# Altium PCB LiPoBattery.PcbDoc
Units mil, origin at the board's own origin, x right, y up, seen from the top; angles counter-clockwise.
Board outline 2000 x 2000 mil, 2 copper layers (Top Layer, Bottom Layer); 22 components, 10 nets, 59 pads, 9 vias.
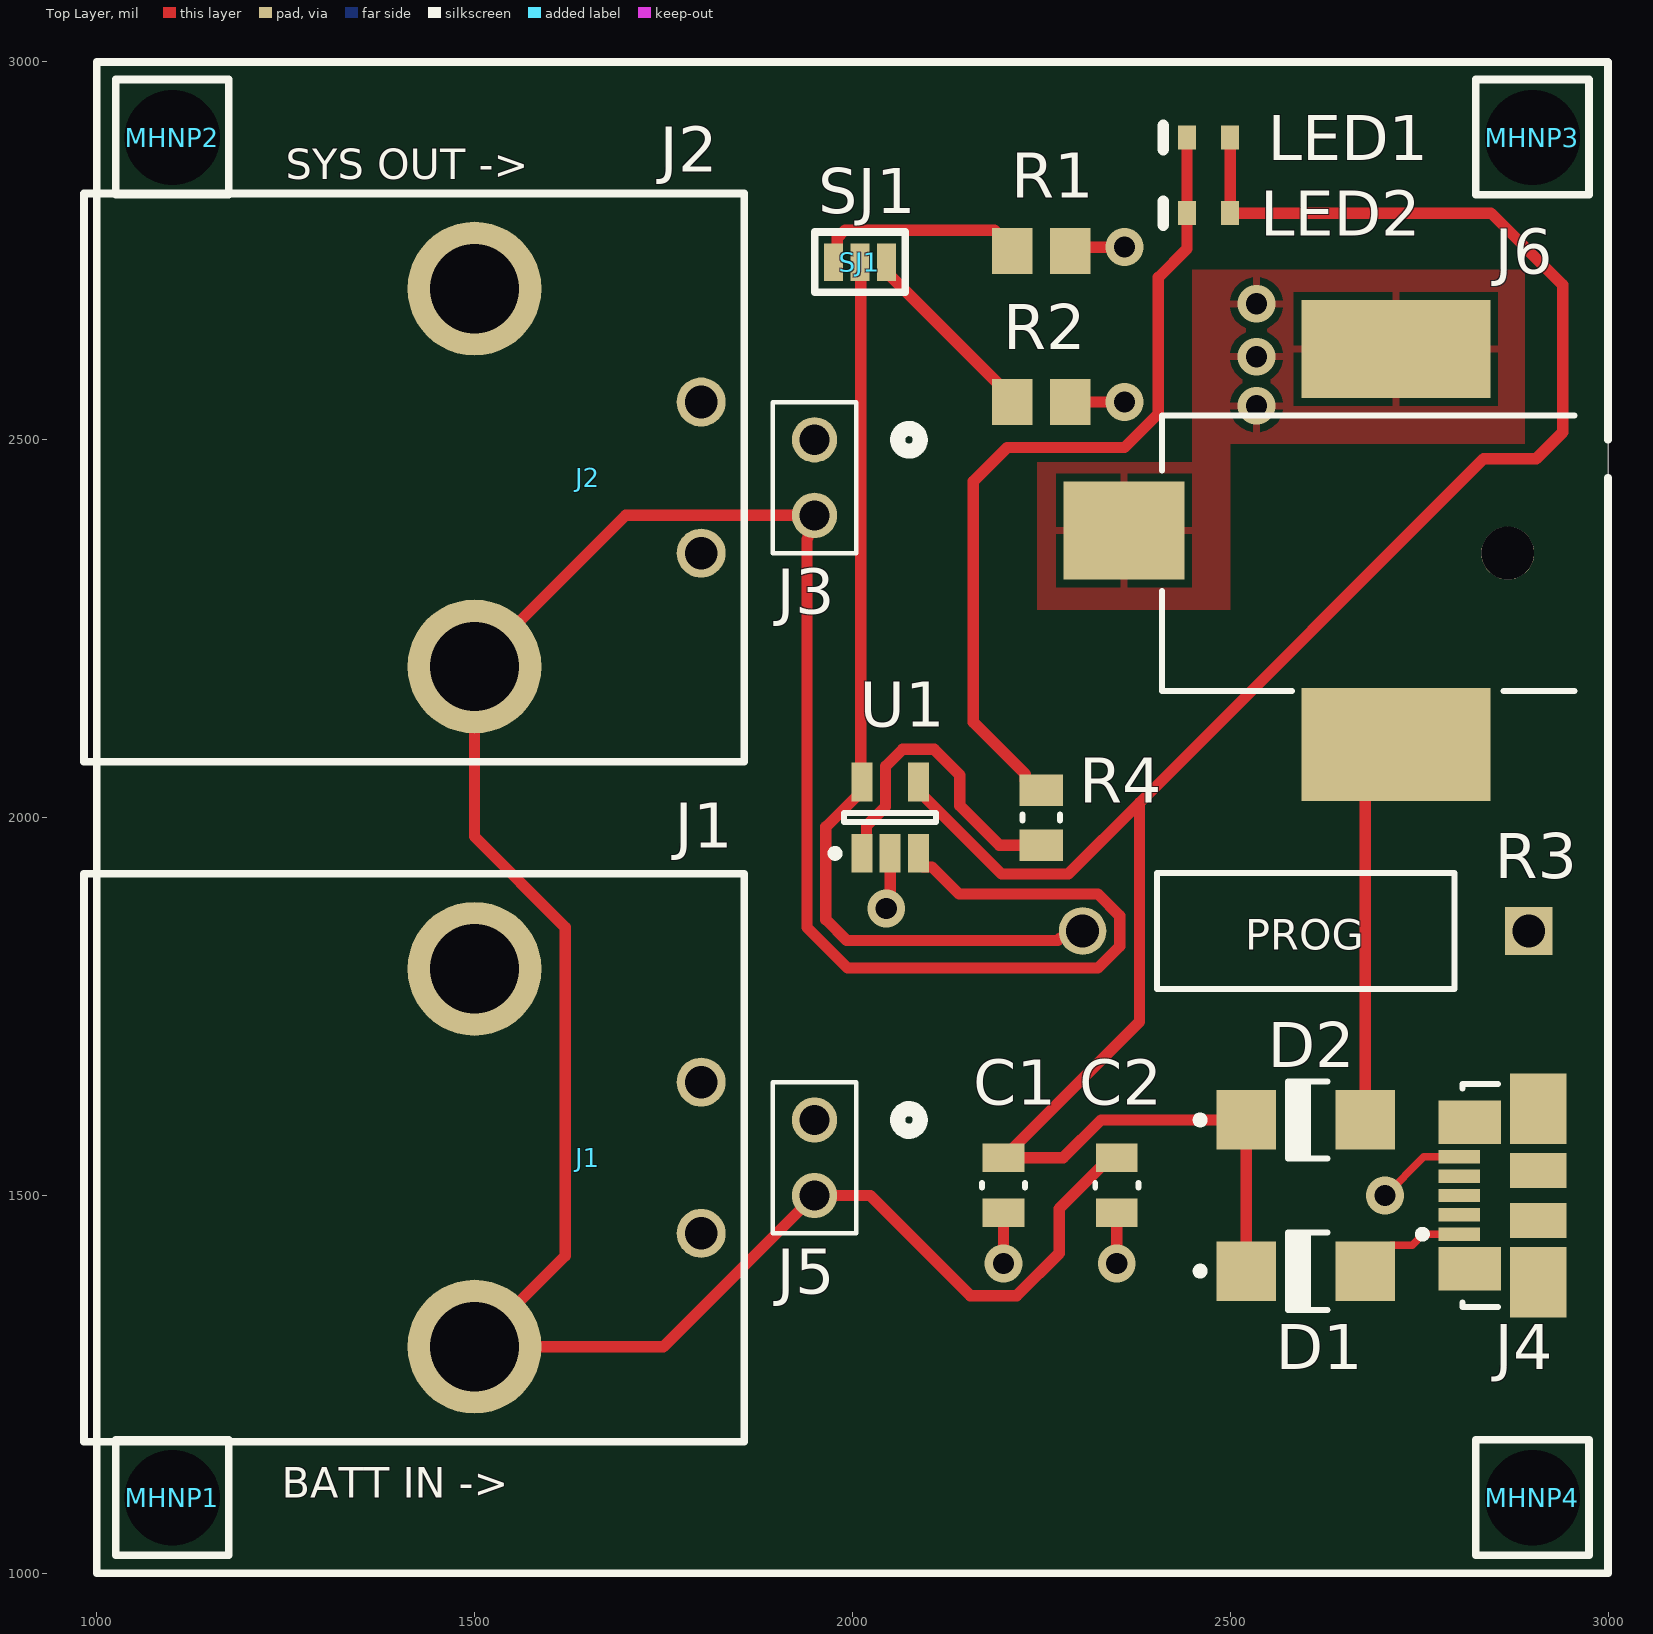
[diagram p0: Top Layer view]
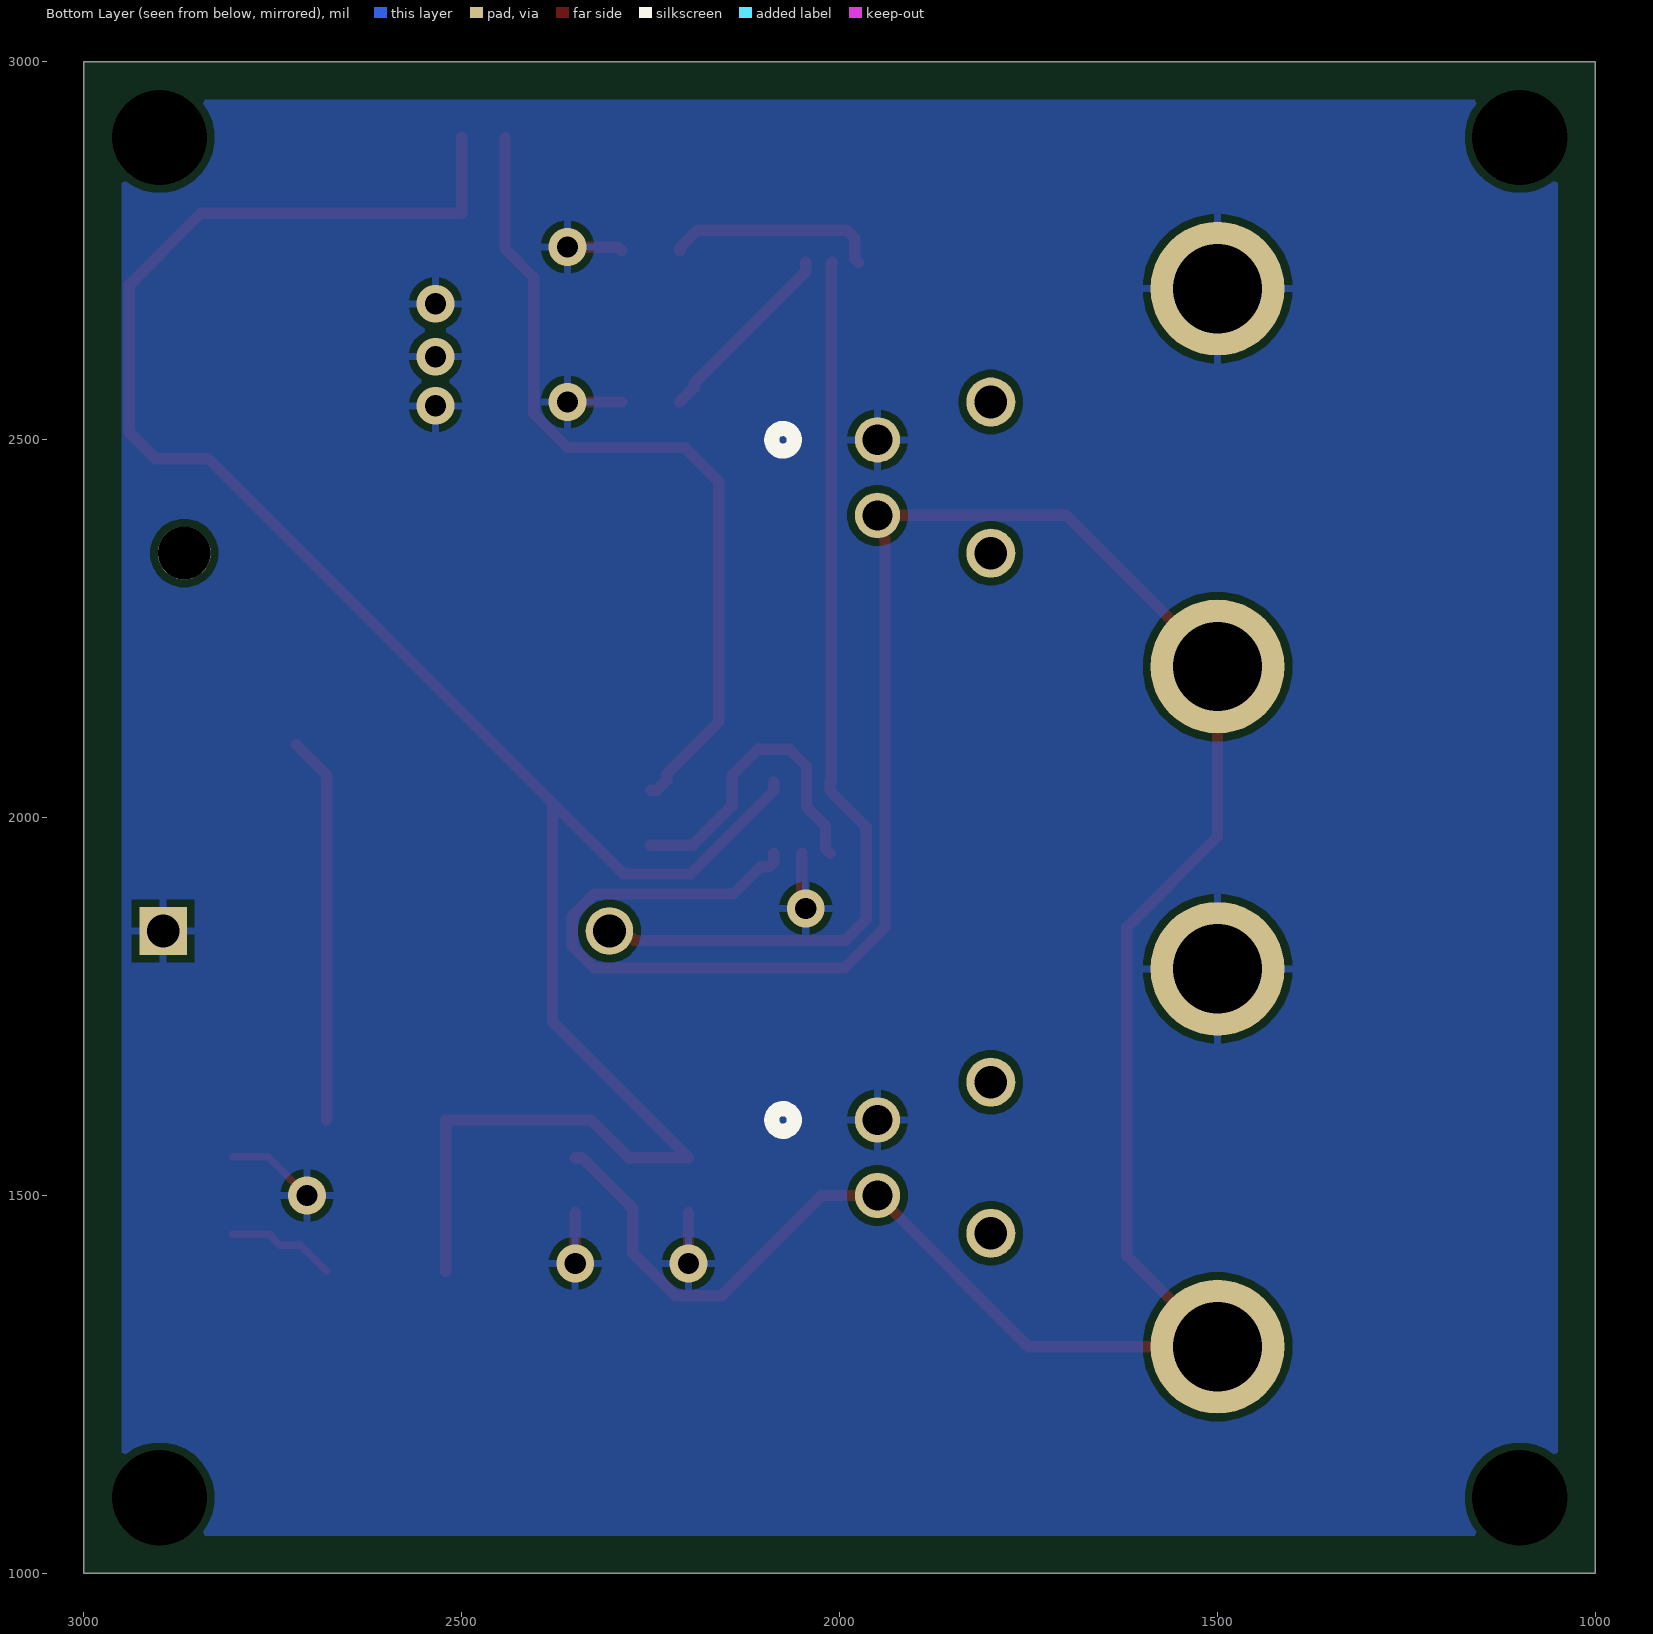
[diagram p1: Bottom Layer view, seen from below]

## Layer stack, top to bottom
Top Solder: solder mask 0.4, Solder Resist, Dk 3.5
Top Layer: signal copper 1.4
Dielectric 1: dielectric 12.6, FR-4, Dk 4.8
Bottom Layer: signal copper 1.4
Bottom Solder: solder mask 0.4, Solder Resist, Dk 3.5

## Board outline
1000,1000 1000,3000 3000,3000 3000,1000

## Design rules (kind name [scope] priority, off if disabled: settings)
Clearance [All] p1: gap=10 ignorepadtopadclearanceinfootprint=TRUE except(0: Arc-Hole Track-Hole SMDPad-Hole THPad-Hole Via-Hole Fill-Hole Poly-Hole Region-Hole Text-Hole)
PolygonConnect [All] p1: connectstyle=Relief reliefconductorwidth=10 reliefentries=4 polygonreliefangle="90 Angle" airgapwidth=10
RoutingVias [All] p1: holewidth=28 width=50 viastyle="Through Hole" minholewidth=28 minwidth=50 maxholewidth=28 maxwidth=50
SolderMaskExpansion [All] p1: expansion=4 istentingtop=FALSE
Width [All] p1: maxlimit=40 minlimit=10 preferedwidth=10 minimp=50.000000 maximp=50.000000 favimp=50.000000
30 further rules are at their usual default settings.

## Components (designator, comment, footprint, x,y, rotation, side; value= is the part's Value field where it differs from the comment)
C1 "4.7uF" FP-CC0805-0_85-MFG 2200,1513.58 r270 top value="4.7 uF"
C2 "4.7uF" FP-CC0805-0_85-MFG 2350,1513.58 r270 top value="4.7 uF"
D1 "40V, 1A" ONSC-SMA-2-403D-02_V 2600,1400 r0 top
D2 "40V, 1A" ONSC-SMA-2-403D-02_V 2600,1600 r0 top
J1 "CONN HEADER R/A 2POS 5.08MM" 1-179276-2 1500,1800 r270 top
J2 "CONN HEADER R/A 2POS 5.08MM" 1-179276-2 1500,2700 r270 top
J3 "2 POS VERT HEADER 0.100\"" 2Pins_AMP 1950,2500 r180 top
J4 "47346-0001" MOLX-47346-0001-5_V 2900,1500 r90 top
J5 "2 POS VERT HEADER 0.100\"" 2Pins_AMP 1950,1600 r180 top
J6 "CONN PWR JACK 2.1X5.5MM SOLDER" FP-RASM722PTR13X-MFG 2700,2350 r90 top
LED1 "RED" VISH-TLMS1000_V 2471.46,2800 r180 top
LED2 "RED" VISH-TLMS1000_V 2471.46,2900 r180 top
MHNP1 "Mounting Hole Non-Plated 3.2mm" MTHNP3P2MM 1100,1100 r90 top
MHNP2 "Mounting Hole Non-Plated 3.2mm" MTHNP3P2MM 1100,2900 r90 top
MHNP3 "Mounting Hole Non-Plated 3.2mm" MTHNP3P2MM 2900,2900 r90 top
MHNP4 "Mounting Hole Non-Plated 3.2mm" MTHNP3P2MM 2900,1100 r90 top
R1 "2k" RESC2013X70X40ML20T20 2250,2550 r180 top
R2 "10k" RESC2013X70X40ML20T20 2250,2750 r180 top
R3 "PROG" VISH-A1-2_V2 2600,1850 r180 top
R4 "330" RESC2013X50X30NL20T20 2250,2000 r270 top
SJ1 "SJUMPER3POS" SJUMPER3POS-Footprint-1 2010,2735 r180 top
U1 "Charge Management Controller" SOT-23-OT5_M 2050,2000 r90 top

## Footprints (in the part's own frame and the unit in brackets; to place one, negate y for a bottom-side part, rotate by r counter-clockwise, add the part's x,y. Pads: shape width x height; smd on the part's side, far side on the other; paste and mask are expansions set on the pad)
1-179276-2 [mm]
  round 4.5 hole 3: 1(0,0) 2(12.7,0)
  round 1.65 hole 1.1: ""(3.81,7.62) ""(8.89,7.62)
  silkscreen extent -3.2,-13.13 15.9,9.08, body extent -3.02,-13.55 16.06,8.55, height 10.86
2Pins_AMP [mil]
  round 60 hole 40 mask+0: 1(0,0) 2(0,100)
  silkscreen extent -140,-50 55,150, body extent 0,0 10,10, height 10
FP-CC0805-0_85-MFG [mm]
  rect 0.95x1.4 smd paste+0 mask+0: 1(-0.925,0) 2(0.925,0)
  silkscreen extent -0.08,-0.72 0.08,0.72, body extent -1.6,-1.05 1.6,1.05, height 0.25
FP-RASM722PTR13X-MFG [mm]
  rect 3.3x4.06 smd paste+0 mask+0: 1(0.76,8.65)
  rect 3.81x6.35 smd paste+0 mask+0: 2(-6.43,-0.49)
  rect 3.3x6.35 smd paste+0 mask+0: 3(6.86,-0.49)
  round 1.78 hole 1.78 unplated paste-1000 mask+0: ""(0,-4.25)
  silkscreen extent -4.63,-6.5 4.63,7.38, body extent -8.43,-7.48 8.61,10.78, height 0.25
MOLX-47346-0001-5_V [mm] "SMD, 5-Leads, Body 7.5x5mm, Pitch 0.65mm"
  rect 0.45x1.38 smd: 1(-1.3,2.46) 2(-0.65,2.46) 3(0,2.46) 4(0.65,2.46) 5(1.3,2.46)
  rect 1.475x2.1 smd: 6(-2.462,2.1) 7(2.462,2.1)
  rect 2.375x1.9 smd: 8(-2.913,-0.2) 11(2.913,-0.2)
  rect 1.175x1.9 smd: 9(-0.837,-0.2) 10(0.837,-0.2)
  silkscreen extent -3.75,1.16 3.75,3.82, body extent -3.99,-2.78 3.99,2.65, height 2.69
MTHNP3P2MM [mm]
  round 1 hole 3.2: ""(0,0)
  silkscreen extent -1.92,-1.9 1.95,1.9
ONSC-SMA-2-403D-02_V [mm]
  rect 2x2 smd: 1(-2,0) 2(2,0)
  silkscreen extent -3.67,-1.3 0.74,1.3, body extent -2.16,-1.3 2.16,1.3, height 2.2
RESC2013X50X30NL20T20 [mm]
  rect 1.05x1.45 smd: 1(-0.925,0) 2(0.925,0)
  silkscreen extent -0.1,-0.63 0.1,0.63, body extent -1.1,-0.72 1.1,0.72, height 0.5
RESC2013X70X40ML20T20 [mm]
  rect 1.35x1.55 smd: 1(-0.975,0) 2(0.975,0)
  body extent -1.1,-0.72 1.1,0.72, height 0.7
SJUMPER3POS-Footprint-1 [mil]
  rect 25x50 smd: 1(-35,0) 2(0,0) 3(35,0)
  silkscreen extent -60,-40 60,40
SOT-23-OT5_M [mm]
  rect 1.3x0.7 smd: 1(-1.2,0.95) 2(-1.2,0) 3(-1.2,-0.95) 4(1.2,-0.95) 5(1.2,0.95)
  silkscreen extent -1.32,-1.55 0.15,1.97, body extent -0.9,-1.55 0.9,1.55, height 1.45
VISH-A1-2_V2 [mm]
  rect 1.6x1.6 hole 1.1: 1(-7.5,0)
  round 1.6 hole 1.1: 2(7.5,0)
  silkscreen extent -5,-1.95 5,1.95, body extent -7.91,-1.95 7.92,1.95, height 3.88
VISH-TLMS1000_V [mm]
  rect 0.6x0.8 smd: 1(-0.725,0) 2(0.725,0)
  silkscreen extent 1.52,-0.4 1.52,0.4, body extent -0.8,-0.4 0.8,0.4, height 0.65

## Part data
C1 C2: library part "CAP CER 4.7UF 6.3V X7R 0805", "4.7µF ±10% 6.3V Ceramic Capacitor X7R 0805 (2012 Metric)", Capacitance="4.7 uF", Manufacturer=Yageo, Manufacturer Part Number=CC0805KKX7R5BB475, Package=CC0805-0.85, Supplier Part Number 1=311-3419-1-ND, Temperature="-30°C to +85°C", Temperature Characteristic=X7R, Temperature Range High=+85°C, Temperature Range Low=-30°C, Tolerance=0.1, Voltage Rating="6.3 V", Automotive=No, Category=Cap, ComponentLink2Description=Datasheet, ComponentLink2URL=http://www.yageo.com/documents/recent/UPY-GPHC_Y5V_6.3V-to-50V_8.pdf, Device Class L1="Passive Components", Device Class L2=Capacitors, Device Class L3="Ceramic Capacitors", Digikey Description="CAP CER 4.7UF 6.3V X7R 0805", Footprint Url=http://www.yageo.com/exep/pages/download/literatures/UPY-C_GEN_24.pdf, Height=0.95mm, Ipc Land Pattern Name=CAPC200125X85, Lead Free=Yes, Material=Ceramic, Mouser Description="Multilayer Ceramic Capacitors MLCC - SMD/SMT 4.7uF 6.3V X7R 10%", Octopart=https://octopart.com/cc0805kkx7r5bb475-yageo-27548069, RoHS=TRUE, Supplier 1=Digi-Key, Supplier 2=Digi-Key, Supplier Part Number 2=311-3419-2-ND
D1 D2: library part "DIODE SCHOTTKY 40V 1A SMA", "Schottky Power Rectifier, 2-Pin SMA, Pb-Free, Cut Tape, Diode Schottky 40V 1A Surface Mount SMA", Manufacturer="ON Semiconductor", Manufacturer Part Number=MBRA140T3G, Supplier Part Number 1=MBRA140T3GOSCT-ND, ComponentLink1Description="Manufacturer URL", ComponentLink1URL=http://www.onsemi.com/, ComponentLink2Description=Datasheet, ComponentLink2URL=http://www.onsemi.cn/pub_link/Collateral/MBRA140T3-D.PDF, ComponentLink3Description="Package Specification", ComponentLink3URL=http://www.onsemi.com/pub_link/Collateral/403D-02.PDF, Configuration=Single, DatasheetVersion="Rev. 10", IFSM Max (A)=30, Mounting Technology="Surface Mount", PackageDescription="2-Pin Small Molded Package, J-Bend Lead, Body 2.605 x 4.315 mm", PackageReference=SMA-2-403D-02, PackageVersion="Rev. G, 07/2012", Packing="Tape and Reel", PartNumber=MBRA140T3G, RoHS=TRUE, Supplier 1=Digi-Key
J1 J2: "Connector Header Through Hole, Right Angle 2 position 0.200\" (5.08mm)", Manufacturer="TE Connectivity AMP Connectors", Manufacturer Part Number=1-179276-2, Supplier Part Number 1=A29545-ND, ComponentLink1Description="Product URL", ComponentLink1URL=https://www.te.com/usa-en/product-1-179276-2.html?te_bu=Cor&te_type=other&te_campaign=oct_glo_manufacturer&elqCampaignId=26136, Supplier 1=Digi-Key
J3 J5: library part "CONN HEADER VERT 2POS 0.100\"", "Connector Header Through Hole 2 position", Manufacturer="Amphenol ICC (FCI)", Manufacturer Part Number=67997-402HLF, Supplier Part Number 1=609-5502-ND, Built_By=EMA_UL_Team, Copyright="Copyright (C) 2018 Accelerated Designs. All rights reserved", RefDes=RefDes, SourceLibrary=Amphenol_2013-08-06_Bergstik_2Row_67997, Supplier 1=Digi-Key
J4: library part "CONN RCPT USB2.0 MICRO B SMD R/A", "Micro-USB B Receptacle with Flange, -30 to 85 degC, 5-Pin SMD, RoHS, Tape and Reel", Color=Black, Manufacturer=Molex, Maximum Current Rating=1.8/ContactA, Maximum Voltage Rating=30VAC, Operating Temperature=-30to85C, Supplier Part Number 1=WM17141CT-ND, Body Orientation=RightAngle, Contact Material=CopperAlloy, Contact Plating=GoldOverPalladiumNickelOverNickel, Datasheet URL=https://datasheet.ciiva.com/30075/304740473460001-io-nectors-30075527.pdf, Datasheet Version=Dec-13, Dimension=7.8x5.43x2.94mm, Gender=RCP, Housing Material=LiquidCrystalPolymer, Manufacturer Part Number=47346-0001, Manufacturer URL=http://www.molex.com/, Mounting=SurfaceMount, Number of Contacts=5, Number of Ports=1, Number of Terminals=5, Packaging=EmbossedTapeandReel, Pitch=0.65mm, RoHS=Yes, Supplier 1=Digi-Key, Termination Method=Solder, Type=MicroUSBTypeB
J6: "Power Barrel Connector Jack 2.10mm ID (0.083\"), 5.50mm OD (0.217\") Surface Mount, Right Angle", Case/Package=SMD/SMT, Color=Black, Current Rating=5A, Manufacturer=Switchcraft, Manufacturer Part Number=RASM722PTR13X, Package Quantity=120, Supplier Part Number 1=SC2028-1-ND, Connector Type=Jack, Contact Material="Copper Alloy", Contact Plating=Tin, Gender=Male, Housing Color=Black, Housing Material=Thermoplastic, Mount="Surface Mount", Shielding=Unshielded, Supplier 1=Digi-Key, Termination=Solder
LED1 LED2: library part "LED RED 0603 SMD", "Low Current LED, 40 mW, 1.8 V, -40 to 100 degC, 2-Pin SMD (0603), RoHS, Tape and Reel", Forward Current If=2mA, Forward Voltage=1.8V, LED Colour=Red, Manufacturer=Vishay, Manufacturer Part Number=TLMS1000-GS08, Package Description="2-Pin Surface Mount Device, Body 1.6 x 0.8 mm", Package Reference=TLMS1000, Supplier Part Number 1=TLMS1000-GS08CT-ND, Automotive Qualification Standard=AEC-Q100, Bulb Size=1.6mmx0.8mm, Datasheet URL=https://datasheet.ciiva.com/5798/1698881-5798337.pdf, Datasheet Version="Rev. 1.7, 02/2011", LED Mounting=SMD, Lens Shape=Rectangular, Luminous Intensity=4mcd, Manufacturer URL=http://www.vishay.com/, Mounting Technology=SurfaceMount, MSL=MSL2-1year, Packaging=CutTape, Product Range=-, Supplier 1=Digi-Key, SVHC=ToBeAdvised, Viewing Angle=80°, Wavelength Typ=636nm
MHNP1 MHNP2 MHNP3 MHNP4: library part MTHNP3P2MM, "Mounting Hole Non-Plated 3.2 mm drill hole", Manufacturer=N/A, Manufacturer Part Number=N/A
R1: library part "RES SMD 2K OHM 5% 1/8W 0805", "2 kOhms ±5% 0.125W, 1/8W Chip Resistor 0805 (2012 Metric) Automotive AEC-Q200 Thick Film", Manufacturer=Panasonic, Manufacturer Part Number=ERJ-6GEYJ202V, Supplier Part Number 1=P2.0KACT-ND, Supplier 1=Digi-Key
R2: library part "RES SMD 10K OHM 1% 1/8W 0805", "10 kOhms ±1% 0.125W, 1/8W Chip Resistor 0805 (2012 Metric) Automotive AEC-Q200 Thick Film", Manufacturer=Panasonic, Manufacturer Part Number=ERJ-6ENF1002V, Supplier Part Number 1=P10.0KCCT-ND, Supplier 1=Digi-Key
R3: library part "RES 62K OHM 2W 5% AXIAL", "Power Metal Film Leaded Resistor, 62 KOhm +/-5%, 2 W, 2-Pin THD, RoHS, Ammo Pack62 kOhms ±5% 2W Through Hole Resistor Axial Automotive AEC-Q200, Flame Retardant Coating, Safety Metal Film", Manufacturer="Vishay Semiconductor", Manufacturer Part Number=PR02000206202JR500, PartNumber=PR02000206202JA100, Power="2 W", Resistance="62 KOhm", Supplier Part Number 1=PPC62KW-2CT-ND, Temperature Coefficient="+/-250 ppm/degC", Tolerance=+/-5%, ComponentLink1Description="Manufacturer URL", ComponentLink1URL=http://www.vishay.com/, ComponentLink2Description=Datasheet, ComponentLink2URL=http://www.vishay.com/docs/28729/28729.pdf, ComponentLink3Description="Package Specification", ComponentLink3URL=http://www.vishay.com/docs/28729/28729.pdf, DatasheetVersion=Jun-13, Mounting Technology="Through Hole", PackageDescription="2-Pin Axial Lead, Body 10 x 3.9 mm", Packing="Ammo Pack", RoHS=TRUE, Supplier 1=Digi-Key
R4: library part "RES SMD 330 OHM 1% 1/8W 0805", "330 Ohms ±1% 0.125W, 1/8W Chip Resistor 0805 (2012 Metric) Automotive AEC-Q200 Thick Film", Manufacturer=Vishay, Manufacturer Part Number=CRCW0805330RFKEA, Supplier Part Number 1=541-330CCT-ND, Supplier 1=Digi-Key
SJ1: "Solder jumper 3 pads and pins", Manufacturer=N/A, Component Type=Miscellaneous, Manufacturer Part Number=N/A, Pins=3
U1: library part "IC LI-ION/LI-POLY CTRLR SOT23-5", "Simple, Miniature Single-Cell, Fully Integrated Li-Ion/Li-Polymer Charge Management Controller, 4.2V, 5-Pin SOT-23, Industrial Temperature, Cut Tape", Manufacturer=Microchip, Manufacturer Part Number=MCP73811T-420I/OT, Supplier Part Number 1=MCP73811T-420I/OTCT-ND, Code_IPC=SOT23-5, DatasheetVersion="revB, Sep-2007", PackageDescription="5-Lead Plastic Small Outline Transistor (OT) [SOT-23]", PackageReference=SOT-23-OT5, PackageVersion="revBB, Aug-2009", Supplier 1=Digi-Key

## Via types
v1: diameter 50, hole 28, Top Layer to Bottom Layer, 9 vias

## Nets (pads, with @x,y where several pads share a name; then routed paths per layer and width w, separated by ;. In a path a pad name is that pad's centre, name@x,y a point inside that pad or via, vN(x,y) a via of type N, cw(c..) or ccw(c..) an arc to the next point about the centre after c; other vN are vias at no path point)
GND: C1.2 C2.2 J1.1 J2.1 J3.1 J4.5 J5.1 J6.1 J6.3 R1.1 R2.1 R3.1 U1.2 | length 473.8
  Top Layer w10: v1(2705,1500) 2756.18,1551.18 J4.5
  Top Layer w15: v1(2044.9,1880) 2050,1885.1 U1.2 ; v1(2200,1410) C1.2 ; R1.1 v1(2360,2550) ; R2.1 2293.39,2755 v1(2360,2755) ; v1(2350,1410) C2.2
  other v1: 2535,2545 2535,2610 2535,2680
NetC1_1: C1.1 D1.1 D2.1 LED1.1 LED2.1 U1.4 | length 3012.6
  Top Layer w15: U1.4 2087.4,2035.43 2197.42,1925.41 2285.79,1925.41 2380,2019.62 ; LED2.1 LED1.1 2845,2800 2940,2705 2940,2510 2905,2475 2835.38,2475 2380,2019.62 ; D1.1 D2.1 2328.99,1600 2278.99,1550 C1.1 2380,1730 2380,2019.62
NetC2_1: C2.1 J1.2 J2.2 J3.2 J5.2 U1.3 | length 3975.4
  Top Layer w15: U1.3 2087.4,1940.94 2093.68,1934.67 2105.49,1934.67 2141.16,1899 2325.02,1899 2353.72,1870.29 2353.72,1829.71 2325.02,1801 1993.75,1801 1940,1854.75 1940,2368.71 1941.39,2370.1 1941.39,2391.39 J3.2 1700,2400 J2.2 1500,1975 1620,1855 1620,1420 J1.2 1750,1300 J5.2 2023.64,1500 2156.14,1367.5 2217.6,1367.5 2273.77,1423.67 2273.77,1482.63 2341.14,1550 C2.1
NetD1_2: D1.2 J4.1 | length 144.6
  Top Layer w10: D1.2 2713.11,1434.37 2740.69,1434.37 2755.14,1448.82 J4.1
NetD2_2: D2.2 J6.2 | length 513.6
  Top Layer w15: D2.2 2678.74,2056.3 J6.2
NetLED1_2: LED1.2 LED2.2 R4.1 | length 1113.5
  Top Layer w15: R4.1 2242.13,2036.42 2228.96,2049.59 2228.96,2057.46 2160,2126.42 2160,2445 2204.95,2489.95 2360.05,2489.95 2405,2534.9 2405,2715 2442.91,2752.91 LED1.2 LED2.2
NetR1_2: R1.2 SJ1.1 | length 254
  Top Layer w15: SJ1.1 2045,2722.5 2192.54,2574.96 2192.54,2569.07 R1.2
NetR2_2: R2.2 SJ1.3 | length 283.9
  Top Layer w15: SJ1.3 1980,2740 1980,2767.25 1990.25,2777.5 2188.05,2777.5 2211.61,2753.94 R2.2
NetR3_2: R3.2 SJ1.2 U1.5 | length 1247
  Top Layer w15: SJ1.2 2011.3,2733.7 2011.3,2048.54 U1.5 2012.6,2035.43 1965,1987.83 1965,1865.11 1992.61,1837.5 2271.94,1837.5 2275.26,1840.82 2295.54,1840.82 R3.2
NetR4_2: R4.2 U1.1 | length 419.8
  Top Layer w15: U1.1 2018.72,1958.88 2018.72,1989.25 2043.88,2014.4 2043.88,2067.84 2066.37,2090.33 2108.43,2090.33 2142.24,2056.53 2142.24,2015.95 2194.61,1963.58 R4.2
pads on no net: J1. J2. J4.2 J4.3 J4.4 J4.6 J4.7 J4.8 J4.9 J4.10 J4.11 J6. MHNP1. MHNP2. MHNP3. MHNP4.

## Polygon pours and split planes (outlines as drawn)
GND on Bottom Layer "GND_L02_P000" (solid, pour order 0): 1050,2950 2950,2950 2950,1050 1050,1050
GND on Top Layer "GND_L01_P002" (solid, pour order 2): 2890,2725 2890,2495 2500,2495 2500,2275 2245,2275 2245,2470 2450,2470 2450,2725

## Silkscreen, mask and mechanical layers (free items; w line width, h text height)
Top Overlay:
  lines w10: 3000,1850 3000,2450 ; 3000,1900 3000,1000 1000,1000 1000,3000 3000,3000 3000,2500
  text "SYS OUT ->" at 1250,2845 h40
  text "PROG" at 2520,1825 h40
  text "BATT IN ->" at 1245,1100 h40

## Text inside footprints (layer, text, board x,y; h text height)
J3: Mechanical 7 "0.19in/4.826mm" at 2555,2462.5 h25 r180; Mechanical 7 "0.095in/2.413mm" at 2617.5,2415 h25 r180; Mechanical 7 "0.1in/2.54mm" at 1780,2462.5 h25 r180; Mechanical 7 "0.1in/2.54mm" at 2025,1925 h25 r180; Mechanical 7 "0.1in/2.54mm" at 2075,2250 h25 r180; Mechanical 7 "Alt Padstyle 2: OX90Y60D30P" at 2287.5,3230 h50 r180; Mechanical 7 "Alt Padstyle 1: OX60Y90D30P" at 2287.5,3155 h50 r180; Mechanical 7 "Right Mtg Padstyle: EX60Y60D30P" at 2337.5,3080 h50 r180; Mechanical 7 "Left Mtg Padstyle: EX60Y60D30P" at 2325,3005 h50 r180; Mechanical 7 "3rd Mtg Padstyle: EX70Y70D70P" at 2312.5,2930 h50 r180; Mechanical 7 "2nd Mtg Padstyle: EX70Y70D70P" at 2312.5,2855 h50 r180; Mechanical 7 "1st Mtg Padstyle: EX80Y80D50P" at 2312.5,2780 h50 r180; Mechanical 7 "Default Padstyle: EX60Y60D40P" at 2312.5,2705 h50 r180
J4: Mechanical 6 "PCB EDGE" at 2969.17,1216.54 h11.81 r90
J5: Mechanical 7 "0.19in/4.826mm" at 2555,1562.5 h25 r180; Mechanical 7 "0.095in/2.413mm" at 2617.5,1515 h25 r180; Mechanical 7 "0.1in/2.54mm" at 1780,1562.5 h25 r180; Mechanical 7 "0.1in/2.54mm" at 2025,1025 h25 r180; Mechanical 7 "0.1in/2.54mm" at 2075,1350 h25 r180; Mechanical 7 "Alt Padstyle 2: OX90Y60D30P" at 2287.5,2330 h50 r180; Mechanical 7 "Alt Padstyle 1: OX60Y90D30P" at 2287.5,2255 h50 r180; Mechanical 7 "Right Mtg Padstyle: EX60Y60D30P" at 2337.5,2180 h50 r180; Mechanical 7 "Left Mtg Padstyle: EX60Y60D30P" at 2325,2105 h50 r180; Mechanical 7 "3rd Mtg Padstyle: EX70Y70D70P" at 2312.5,2030 h50 r180; Mechanical 7 "2nd Mtg Padstyle: EX70Y70D70P" at 2312.5,1955 h50 r180; Mechanical 7 "1st Mtg Padstyle: EX80Y80D50P" at 2312.5,1880 h50 r180; Mechanical 7 "Default Padstyle: EX60Y60D40P" at 2312.5,1805 h50 r180